# Altium PCB PCB Clape.PcbDoc
Units mm, origin at the board's own origin, x right, y up, seen from the top; angles counter-clockwise.
Board outline 62.1 x 45.59 mm, 2 copper layers (Top Layer, Bottom Layer); 27 components, 17 nets, 57 pads, 0 vias.
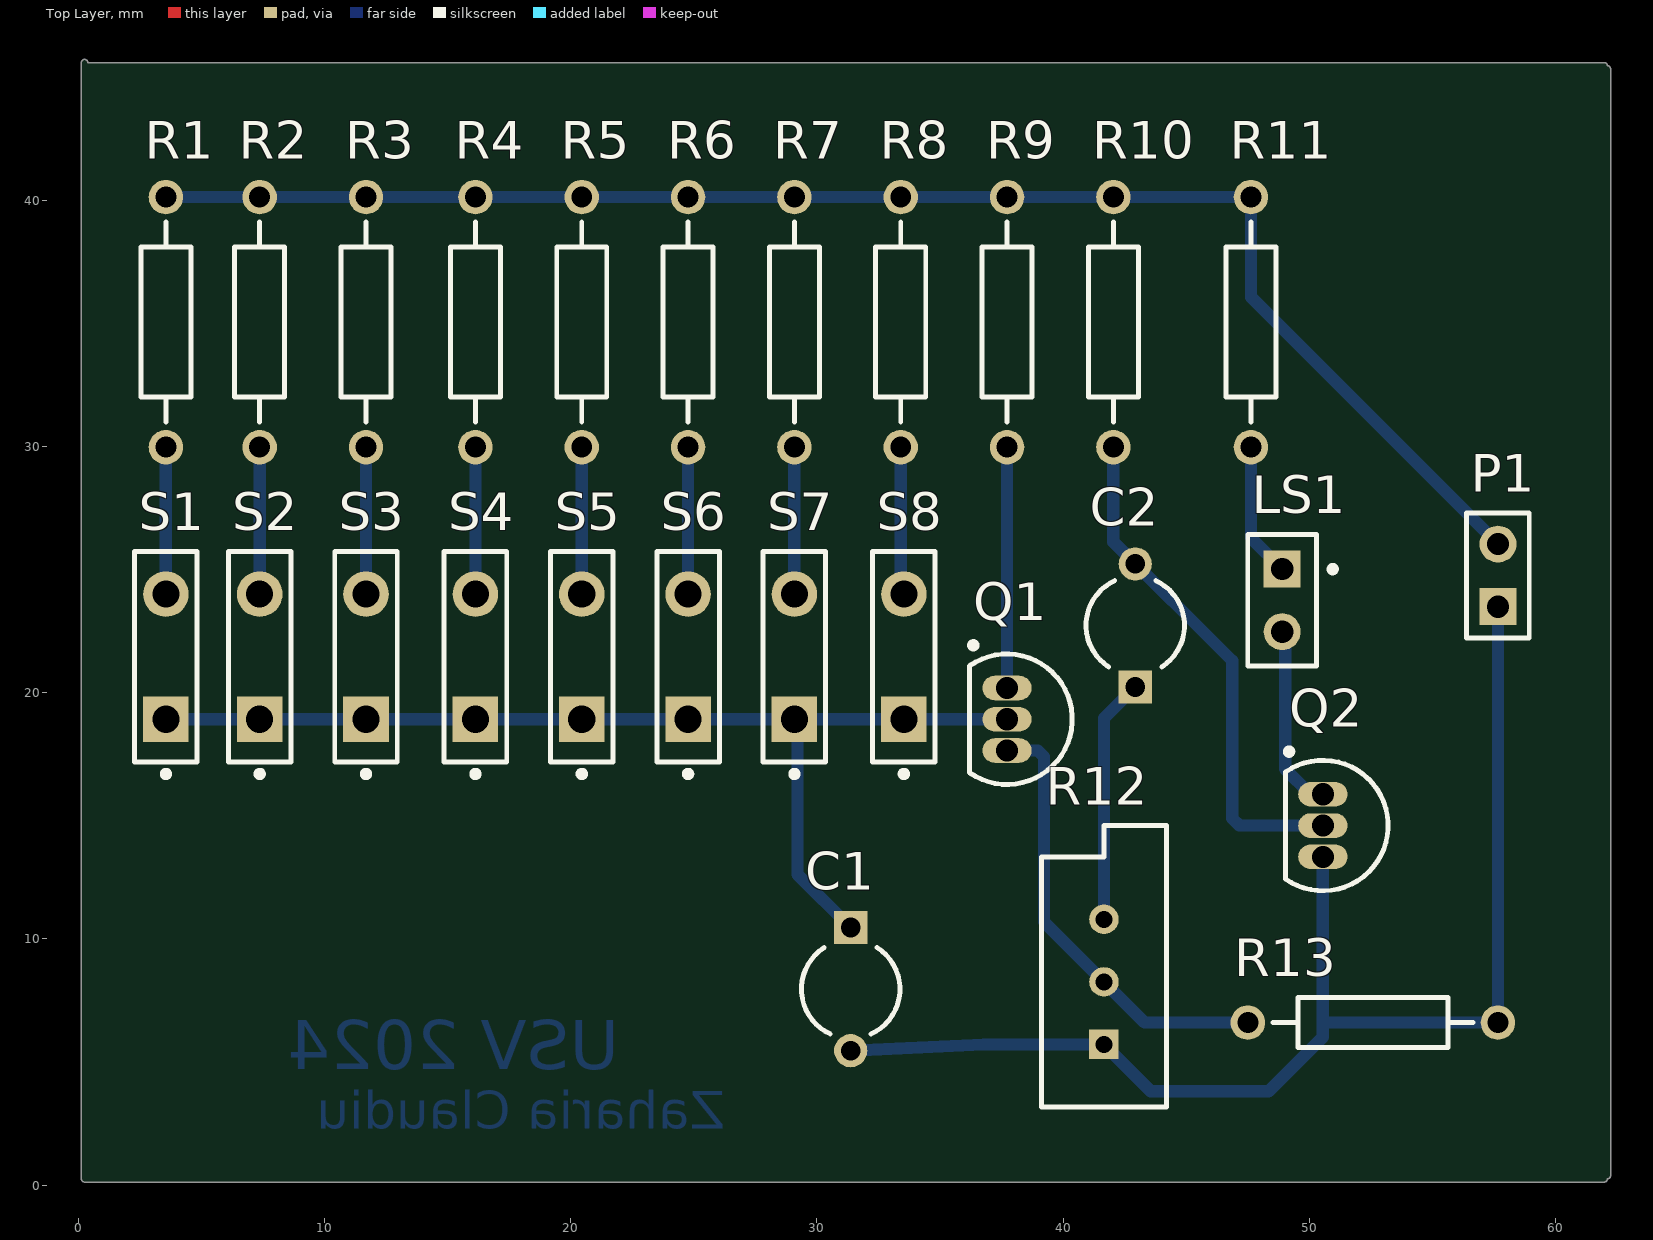
[diagram p0: Top Layer view]
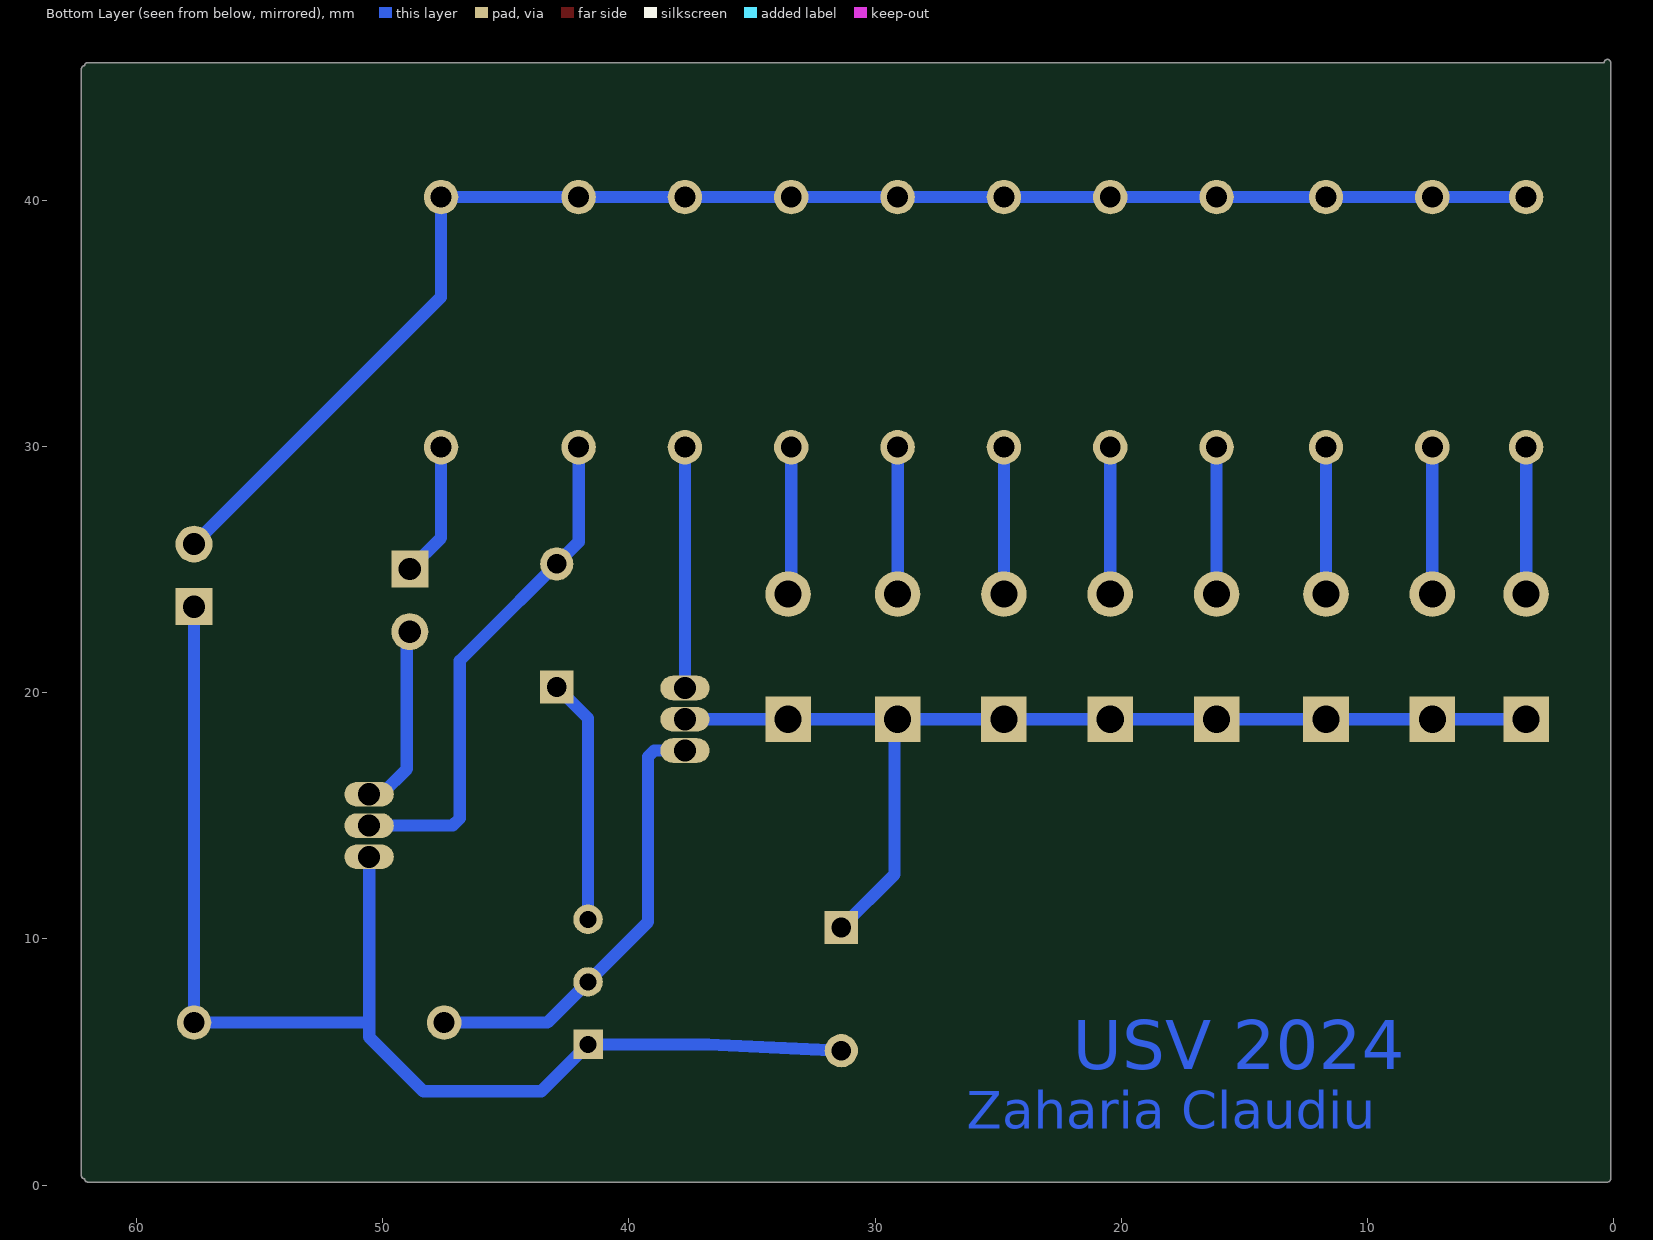
[diagram p1: Bottom Layer view, seen from below]

## Layer stack, top to bottom
Top Solder: solder mask 0.0102, Solder Resist, Dk 3.5
Top Layer: signal copper 0.0356
Dielectric 1: dielectric 0.32, FR-4, Dk 4.8
Bottom Layer: signal copper 0.0356
Bottom Solder: solder mask 0.0102, Solder Resist, Dk 3.5

## Board outline
0.254,0.127 cw(c0.254,0.254) 0.127,0.254 0.127,45.593 cw(c0.254,45.593) 0.381,45.593 61.976,45.593 cw(c61.976,45.466) 62.103,45.466 cw(c62.103,45.339) 62.23,45.339 62.23,0.381 cw(c62.103,0.381) 62.103,0.254 cw(c61.976,0.254) 61.976,0.127

## Design rules (kind name [scope] priority, off if disabled: settings)
Clearance [All] p1: gap=0.254 ignorepadtopadclearanceinfootprint=FALSE except(0: Arc-Hole Track-Hole SMDPad-Hole THPad-Hole Via-Hole Fill-Hole Poly-Hole Region-Hole Text-Hole)
PolygonConnect [All] p1: connectstyle=Relief reliefconductorwidth=0.254 reliefentries=4 polygonreliefangle="90 Angle" airgapwidth=0.254
RoutingVias [All] p1: holewidth=0.711 width=1.27 viastyle="Through Hole" minholewidth=0.711 minwidth=1.27 maxholewidth=0.711 maxwidth=1.27
SolderMaskExpansion [All] p1: expansion=0.102 istentingtop=FALSE
Width [All] p1: maxlimit=5 minlimit=0.4 preferedwidth=0.5
30 further rules are at their usual default settings.

## Components (designator, comment, footprint, x,y, rotation, side; value= is the part's Value field where it differs from the comment)
C1 "Cap2" CAPR5-4X5 31.369,7.961 r270 top value=.01
C2 "Cap2" CAPR5-4X5 42.926,22.733 r90 top value=.1uF
LS1 "Speaker" PIN2 48.895,25.019 r270 top
P1 "Header 2" HDR1X2 57.658,23.495 r90 top
Q1 "NPN (2N6028)" TO-226-AA 37.719,18.923 r180 top
Q2 "NPN (2N2222)" TO-226-AA 50.546,14.605 r180 top
R1 "Res2" AXIAL-0.4 3.556,35.052 r90 top value=10K
R2 "Res2" AXIAL-0.4 7.366,35.052 r90 top value=15K
R3 "Res2" AXIAL-0.4 11.684,35.052 r90 top value=22K
R4 "Res2" AXIAL-0.4 16.129,35.052 r90 top value=33K
R5 "Res2" AXIAL-0.4 20.447,35.052 r90 top value=47K
R6 "Res2" AXIAL-0.4 24.765,35.052 r90 top value=68K
R7 "Res2" AXIAL-0.4 29.083,35.052 r90 top value=100K
R8 "Res2" AXIAL-0.4 33.401,35.052 r90 top value=150K
R9 "Res2" AXIAL-0.4 37.719,35.052 r90 top value=100
R10 "Res2" AXIAL-0.4 42.037,35.052 r90 top value=10K
R11 "Res2" AXIAL-0.4 47.625,35.052 r90 top value=220
R12 "RPot" VR5 41.656,8.255 r90 top value=5K
R13 "Res2" AXIAL-0.4 52.578,6.604 r180 top value=100
S1 "SW-PB" SPST-2 3.556,21.463 r90 top
S2 "SW-PB" SPST-2 7.366,21.463 r90 top
S3 "SW-PB" SPST-2 11.684,21.463 r90 top
S4 "SW-PB" SPST-2 16.129,21.463 r90 top
S5 "SW-PB" SPST-2 20.447,21.463 r90 top
S6 "SW-PB" SPST-2 24.765,21.463 r90 top
S7 "SW-PB" SPST-2 29.083,21.463 r90 top
S8 "SW-PB" SPST-2 33.528,21.463 r90 top

## Footprints (in the part's own frame and the unit in brackets; to place one, negate y for a bottom-side part, rotate by r counter-clockwise, add the part's x,y. Pads: shape width x height; smd on the part's side, far side on the other; paste and mask are expansions set on the pad)
AXIAL-0.4 [mm] "Axial Device, Thru-Hole; 2 Leads; 0.4 in Pin Spacing"
  round 1.4 hole 0.85: 1(-5.08,0) 2(5.08,0)
  silkscreen extent -4.06,-1.02 4.06,1.02
CAPR5-4X5 [mm] "Capacitor; 2 Leads"
  rect 1.35x1.35 hole 0.8: 1(-2.5,0)
  round 1.35 hole 0.8: 2(2.5,0)
  silkscreen extent -1.69,-2 1.82,2
HDR1X2 [mm] "Connector; Header; 2 Position"
  rect 1.5x1.5 hole 0.9: 1(0,0)
  round 1.5 hole 0.9: 2(2.54,0)
  silkscreen extent -1.27,-1.27 3.81,1.27
PIN2 [mm] "Photosensitive Diode; 2 Leads"
  rect 1.5x1.5 hole 0.9: 1(0,0)
  round 1.5 hole 0.9: 2(2.54,0)
  silkscreen extent -1.4,-1.4 3.94,2.18
SPST-2 [mm] "Switch; 2 Leads"
  rect 1.85x1.85 hole 1.1: 1(-2.54,0)
  round 1.85 hole 1.1: 2(2.54,0)
  silkscreen extent -4.89,-1.27 4.28,1.27
TO-226-AA [mm] "TO, Flat Index; 3 In-Line, Axial Leads; Body Dia. 4.8mm; Leads 0.55 x 0.51 mm (max)"
  oval 2x1 hole 0.9: 1(0,-1.27) 2(0,0) 3(0,1.27)
  silkscreen extent -2.65,-3.13 1.52,2.65, body extent -2.65,-2.66 1.52,2.66, height 5.33
VR5 [mm] "Thru-Hole; 3 Leads"
  rect 1.2x1.2 hole 0.7: 1(-2.54,0)
  round 1.2 hole 0.7: 2(0,0) 3(2.54,0)
  silkscreen extent -5.08,-2.54 6.35,2.54

## Part data
C1 C2: "Capacitor", PackageDescription="Capacitor; 2 Leads", PackageReference=CAPR5-4X5, Published=23-Sep-2002, Publisher="Altium Limited"
LS1: "Loudspeaker", LatestRevisionDate=17-Jul-2002, LatestRevisionNote="Re-released for DXP Platform.", PackageReference=PIN2, Published=24-Mar-1999, Publisher="Altium Limited"
P1: "Header, 2-Pin", LatestRevisionDate=17-Jul-2002, LatestRevisionNote="Re-released for DXP Platform.", Publisher="Altium Limited"
Q1 Q2: library part NPN, "NPN Bipolar Transistor", Code_JEDEC=TO-226-AA, LatestRevisionDate=17-Jul-2002, LatestRevisionNote="Re-released for DXP Platform.", PackageDescription="TO, Flat Index; 3 In-Line, Axial Leads; Body Dia. 4.8mm; Leads 0.55 x 0.51 mm (max)", PackageReference=TO-226-AA, Published=8-Jun-2000, Publisher="Altium Limited"
R1 R2 R3 R4 R5 R6 R7 R8 R9 R10 R11 R13: "Resistor", LatestRevisionDate=17-Jul-2002, LatestRevisionNote="Re-released for DXP Platform.", PackageDescription="Axial Device, Thru-Hole; 2 Leads; 0.4 in Pin Spacing", PackageReference=AXIAL-0.4, Published=8-Jun-2000, Publisher="Altium Limited"
R12: "Potentiometer", LatestRevisionDate=17-Jul-2002, LatestRevisionNote="Re-released for DXP Platform.", PackageDescription="Variable Resistor, Thru-Hole; 3 Leads", PackageReference=VR5, Published=8-Jun-2000, Publisher="Altium Limited", Set Position=0.5, Sim Note="Enter the Resistance value and the set point into parameter fields."
S1 S2 S3 S4 S5 S6 S7 S8: "Switch", LatestRevisionDate=17-Jul-2002, LatestRevisionNote="Re-released for DXP Platform.", PackageDescription="Switch; 2 Leads", PackageReference=SPST-2, Published=24-Mar-1999, Publisher="Altium Limited"

## Nets (pads, with @x,y where several pads share a name; then routed paths per layer and width w, separated by ;. In a path a pad name is that pad's centre, name@x,y a point inside that pad or via, vN(x,y) a via of type N, cw(c..) or ccw(c..) an arc to the next point about the centre after c; other vN are vias at no path point)
"+9 +12V": P1.2 R1.2 R2.2 R3.2 R4.2 R5.2 R6.2 R7.2 R8.2 R9.2 R10.2 R11.2 | length 62.5
  Bottom Layer w0.5: R1.2 R2.2 R3.2 R4.2 R5.2 R6.2 R7.2 R8.2 R9.2 R10.2 R11.2 47.625,36.068 P1.2@57.816,25.877
GND: C1.2 P1.1 Q2.3 R12.1 R13.1 | length 52.2
  Bottom Layer w0.5: C1.2 36.779,5.715 R12.1 43.561,3.81 48.336,3.81 50.546,6.02 50.546,6.604 ; Q2.3 50.546,6.604 ; P1.1 R13.1 50.546,6.604
NetC1_1: C1.1 Q1.2 S1.1 S2.1 S3.1 S4.1 S5.1 S6.1 S7.1 S8.1 | length 43.5
  Bottom Layer w0.5: S1.1 7.62,18.923 11.938,18.923 16.256,18.923 20.574,18.923 24.892,18.923 S7.1@29.21,18.923 ; C1.1 29.21,12.62 S7.1@29.21,18.923 ; Q1.2 S8.1 S7.1@29.21,18.923
NetC2_1: C2.1 R12.3 | length 10
  Bottom Layer w0.5: R12.3 41.656,18.963 C2.1
NetC2_2: C2.2 Q2.2 R10.1 | length 20.9
  Bottom Layer w0.5: R10.1 42.037,26.122 46.863,21.296 46.863,14.898 47.156,14.605 Q2.2
NetLS1_1: LS1.1 R11.1 | length 5.5
  Bottom Layer w0.5: R11.1 47.625,26.289 LS1.1
NetLS1_2: LS1.2 Q2.1 | length 7.6
  Bottom Layer w0.5: LS1.2 49.014,22.36 49.014,16.907 50.046,15.875 Q2.1
NetQ1_1: Q1.1 R9.1 | length 9.8
  Bottom Layer w0.5: Q1.1 R9.1
NetQ1_3: Q1.3 R12.2 R13.2 | length 18.3
  Bottom Layer w0.5: Q1.3 38.964,17.653 39.218,17.399 39.218,10.693 R12.2 43.307,6.604 R13.2
NetR1_1: R1.1 S1.2 | length 6
  Bottom Layer w0.5: S1.2 R1.1
NetR2_1: R2.1 S2.2 | length 6
  Bottom Layer w0.5: S2.2 R2.1
NetR3_1: R3.1 S3.2 | length 6
  Bottom Layer w0.5: S3.2 R3.1
NetR4_1: R4.1 S4.2 | length 6
  Bottom Layer w0.5: S4.2 R4.1
NetR5_1: R5.1 S5.2 | length 6
  Bottom Layer w0.5: S5.2 R5.1
NetR6_1: R6.1 S6.2 | length 6
  Bottom Layer w0.5: S6.2 R6.1
NetR7_1: R7.1 S7.2 | length 6
  Bottom Layer w0.5: S7.2 R7.1
NetR8_1: R8.1 S8.2 | length 6
  Bottom Layer w0.5: R8.1 33.401,24.13 S8.2

## Other copper
Bottom Layer:
  text "USV 2024" at 21.971,4.699 h2
  text "Zaharia Claudiu" at 26.282,2.286 h1.52

## Silkscreen, mask and mechanical layers (free items; w line width, h text height)
Mechanical 1:
  lines w0.5: 1.27,45.466 61.976,45.466 62.103,45.339 62.103,0.381 61.976,0.254 0.254,0.254 0.254,45.593 0.381,45.466 2.159,45.466